# EAGLE board sch (EAGLE 7.6.0)

Size 160 x 100 mm. Coordinates in mm from the lower left corner, seen from the top.
Outline: 0,0 160,0 160,100 0,100 0,0
Copper layers (1*16): Top 0.035mm / dielectric 1.5mm / Bottom 0.035mm
Design rules "default": minimum track width 10mil, minimum drill 24mil, track to track 8mil, track to pad 8mil, pad to pad 8mil, via to via 8mil, smd to smd 8mil, copper to edge 40mil, drill to drill 8mil, minimum pad ring 10mil, minimum via ring 8mil, stop-mask expansion 4mil, vias tented up to drill 0mil, thermal gap 10mil

## Footprints (pad centres in the part's own frame; a part is rotated, then mirrored left to right if it is on the bottom)
0204/7 = drill 0.813 octagon: 1 -3.81,0; 2 3.81,0
ARDUINO_NANO = drill 0.8 square: 1 -20.32,-7.62 | drill 0.8: 2 -17.78,-7.62; 3 -15.24,-7.62; 4 -12.7,-7.62; 5 -10.16,-7.62; 6 -7.62,-7.62; 7 -5.08,-7.62; 8 -2.54,-7.62; 9 0,-7.62; 10 2.54,-7.62; 11 5.08,-7.62; 12 7.62,-7.62; 13 10.16,-7.62; 14 12.7,-7.62; 15 15.24,-7.62; 16 15.24,7.62; 17 12.7,7.62; 18 10.16,7.62; 19 7.62,7.62; 20 5.08,7.62; 21 2.54,7.62; 22 0,7.62; 23 -2.54,7.62; 24 -5.08,7.62; 25 -7.62,7.62; 26 -10.16,7.62; 27 -12.7,7.62; 28 -15.24,7.62; 29 -17.78,7.62; 30 -20.32,7.62 | hole 1.778: -22.86,-7.62; -22.86,7.62; 17.78,7.62; 17.78,-7.62
TUXGR_16X2_R2 = drill 1 pad 1.676: 1 -32,15.5; 2 -29.46,15.5; 3 -26.92,15.5; 4 -24.38,15.5; 5 -21.84,15.5; 6 -19.3,15.5; 7 -16.76,15.5; 8 -14.22,15.5; 9 -11.68,15.5; 10 -9.14,15.5; 11 -6.6,15.5; 12 -4.06,15.5; 13 -1.52,15.5; 14 1.02,15.5; 15 3.56,15.5; 16 6.1,15.5 | hole 2.5: -37.5,-15.5; 37.5,-15.5; -37.5,15.5; 37.5,15.5
DIL14 = drill 0.813 long: 1 -7.62,-3.81; 2 -5.08,-3.81; 3 -2.54,-3.81; 4 0,-3.81; 5 2.54,-3.81; 6 5.08,-3.81; 7 7.62,-3.81; 8 7.62,3.81; 9 5.08,3.81; 10 2.54,3.81; 11 0,3.81; 12 -2.54,3.81; 13 -5.08,3.81; 14 -7.62,3.81
B64Y = drill 0.813 long: A 2.54,0; E -2.54,0; S 0,0

## Placement (x,y rotation side)
220  10k  [0204/7]  -40.64,58.42 0 top  (outside the outline)
ARDUINO_NANO1  [ARDUINO_NANO]  38.1,66.04 0 top
DIS1  TUXGR_16X2_R2  [TUXGR_16X2_R2]  60.96,29.21 0 top
IC1  LM324N  [DIL14]  52.07,85.09 0 top
R1  10k  [0204/7]  -50.8,58.42 0 top  (outside the outline)
R2  100k  [0204/7]  15.24,31.75 0 top
R3  10k  [0204/7]  15.24,43.18 0 top
R4  10k  [0204/7]  -17.78,66.04 0 top  (outside the outline)
R5  10k  [0204/7]  -27.94,66.04 0 top  (outside the outline)
R6  [B64Y]  -16.51,59.69 0 top  (outside the outline)
R7  10k  [0204/7]  25.4,87.63 0 top
R8  100k  [0204/7]  -48.26,66.04 0 top  (outside the outline)
R9  10k  [0204/7]  -58.42,66.04 0 top  (outside the outline)
R10  10k  [0204/7]  -68.58,66.04 0 top  (outside the outline)
R11  [B64Y]  12.7,52.07 0 top
R12  10k  [0204/7]  -78.74,66.04 0 top  (outside the outline)
R13  100k  [0204/7]  -17.78,69.85 0 top  (outside the outline)
R14  10k  [0204/7]  -27.94,69.85 0 top  (outside the outline)
R15  10k  [0204/7]  -38.1,69.85 0 top  (outside the outline)
R16  [B64Y]  -31.75,59.69 0 top  (outside the outline)
R17  10k  [0204/7]  -48.26,69.85 0 top  (outside the outline)
R18  10k  [0204/7]  -58.42,69.85 0 top  (outside the outline)

## Library data of the parts
220 R1-R5 R7-R10 R12-R15 R17 R18 = rcl
ARDUINO_NANO1 = ArduinoNanoV30
DIS1 = display-lcd; OC_FARNELL: unknown; OC_NEWARK: unknown
IC1 = linear
R6 R11 R16 = pot

## Nets
+5V: ARDUINO_NANO1.15 DIS1.2 DIS1.15 IC1.4 R6.E R16.E
+5V1: R11.E
AC1_1: R1.2
AC1_2: R2.1
AC1_3: R7.2
AC1_4: R8.1
AC1_5: R12.2
AC1_6: R13.1
AN0: ARDUINO_NANO1.4 IC1.1 R5.1
AN1: ARDUINO_NANO1.5 IC1.7 R17.1
AN2: ARDUINO_NANO1.6 IC1.8 R18.1
D4: ARDUINO_NANO1.26 DIS1.11
D5: ARDUINO_NANO1.24 DIS1.12
D6: ARDUINO_NANO1.23 DIS1.13
D7: ARDUINO_NANO1.22 DIS1.14
ENA: ARDUINO_NANO1.28 DIS1.6
GND: 220.2 ARDUINO_NANO1.14 ARDUINO_NANO1.19 DIS1.1 DIS1.5 IC1.11 R3.2 R6.A R14.2 R16.A
GND1: R9.2 R11.A
IN1: IC1.3 R1.1 R2.2 R3.1 R4.1
IN2: IC1.5 R7.1 R8.2 R9.1 R10.1
IN3: IC1.10 R12.1 R13.2 R14.1 R15.1
N$1: IC1.9 R18.2
N$2: IC1.2 R5.2
N$3: 220.1 DIS1.16
N$5: IC1.6 R17.2
N$13: ARDUINO_NANO1.12
OFFSET1: R4.2 R6.S
OFFSET2: R10.2 R11.S
OFFSET3: R15.2 R16.S
RS: ARDUINO_NANO1.29 DIS1.4
V0: DIS1.3

## Tracks (layer width: path | path; a pad name or v marks a point on that pad's centre or on a via)
+5V  (5 unrouted)
AN0  (2 unrouted)
AN1  (2 unrouted)
AN2  (2 unrouted)
D4  (1 unrouted)
D5  (1 unrouted)
D6  (1 unrouted)
D7  (1 unrouted)
ENA  (1 unrouted)
GND  (9 unrouted)
GND1  (1 unrouted)
IN1  (4 unrouted)
IN2  (4 unrouted)
IN3  (4 unrouted)
N$1  (1 unrouted)
N$2  (1 unrouted)
N$3  (1 unrouted)
N$5  (1 unrouted)
OFFSET1  (1 unrouted)
OFFSET2  (1 unrouted)
OFFSET3  (1 unrouted)
RS  (1 unrouted)